# Altium PCB KL25Z_CAN_Interface.PcbDoc
Units mil, origin at the board's own origin, x right, y up, seen from the top; angles counter-clockwise.
Board outline 3185 x 2170 mil, 2 copper layers (Top Layer, Bottom Layer); 71 components, 52 nets, 234 pads, 28 vias.
Unrouted connection lines stored in the file: 2.
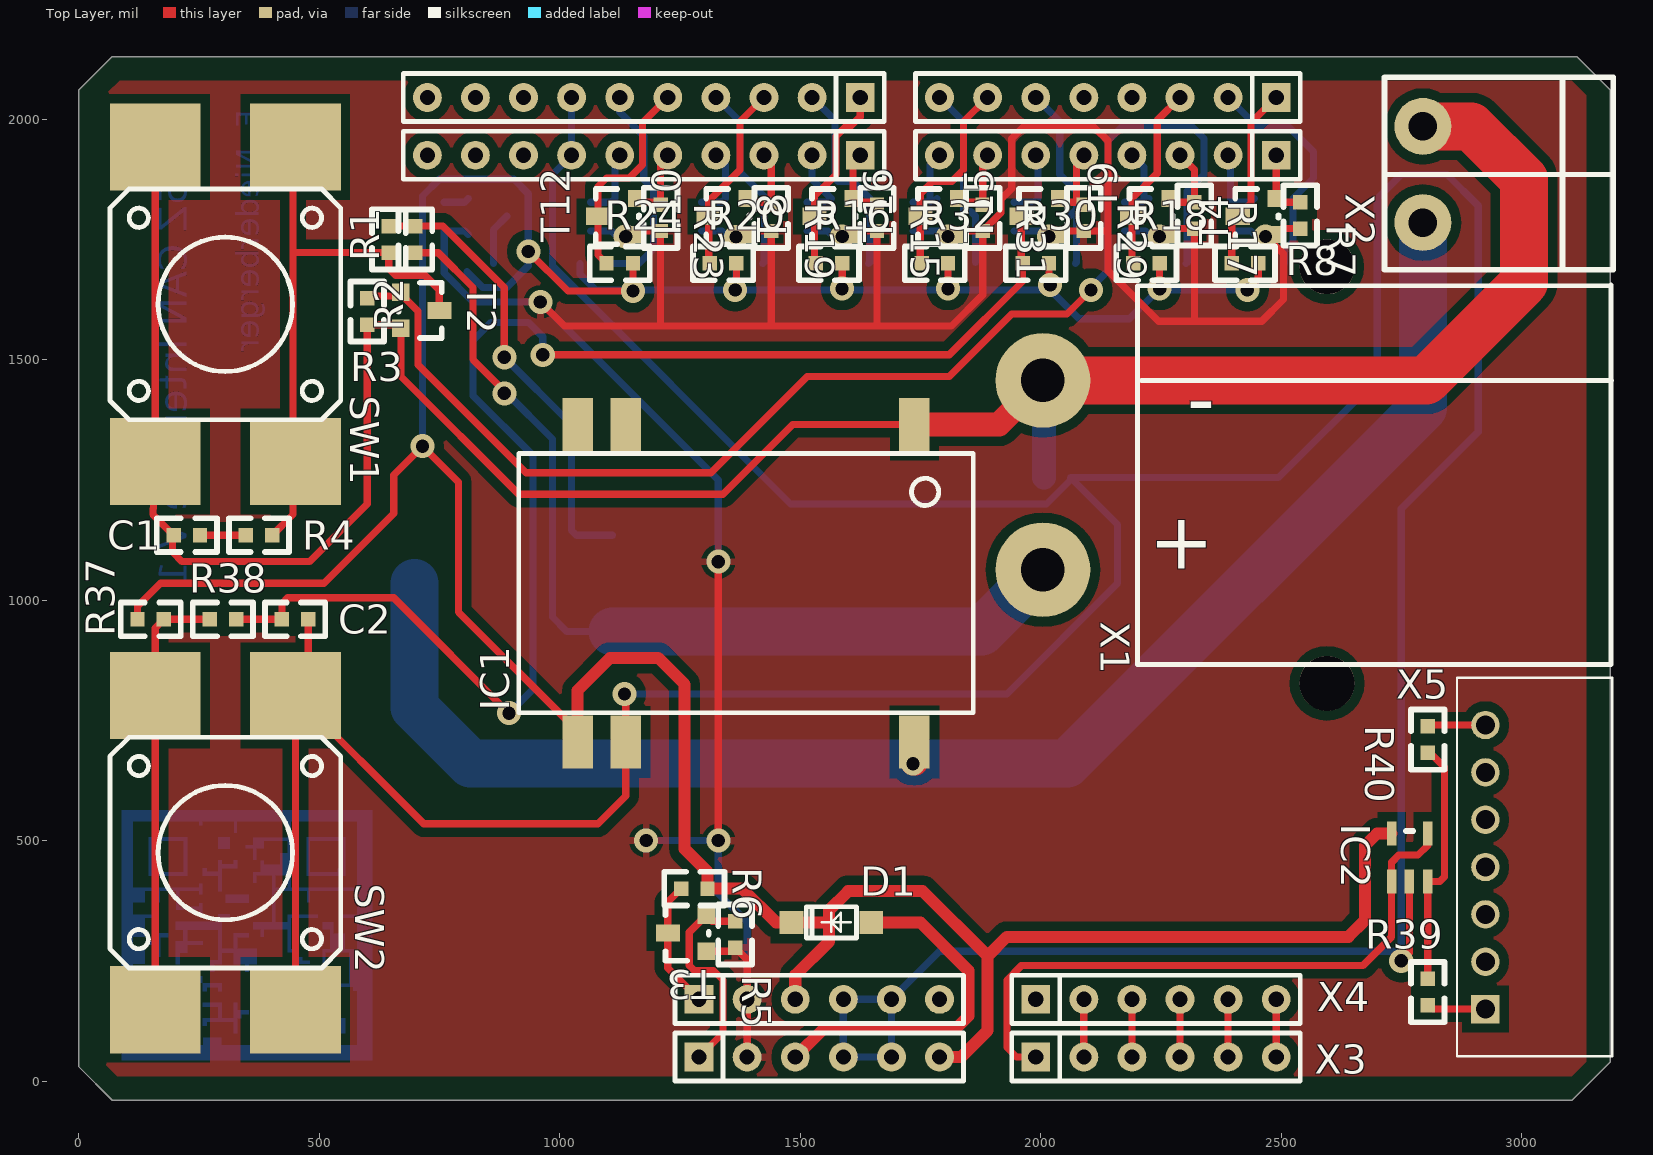
[diagram p0: Top Layer view]
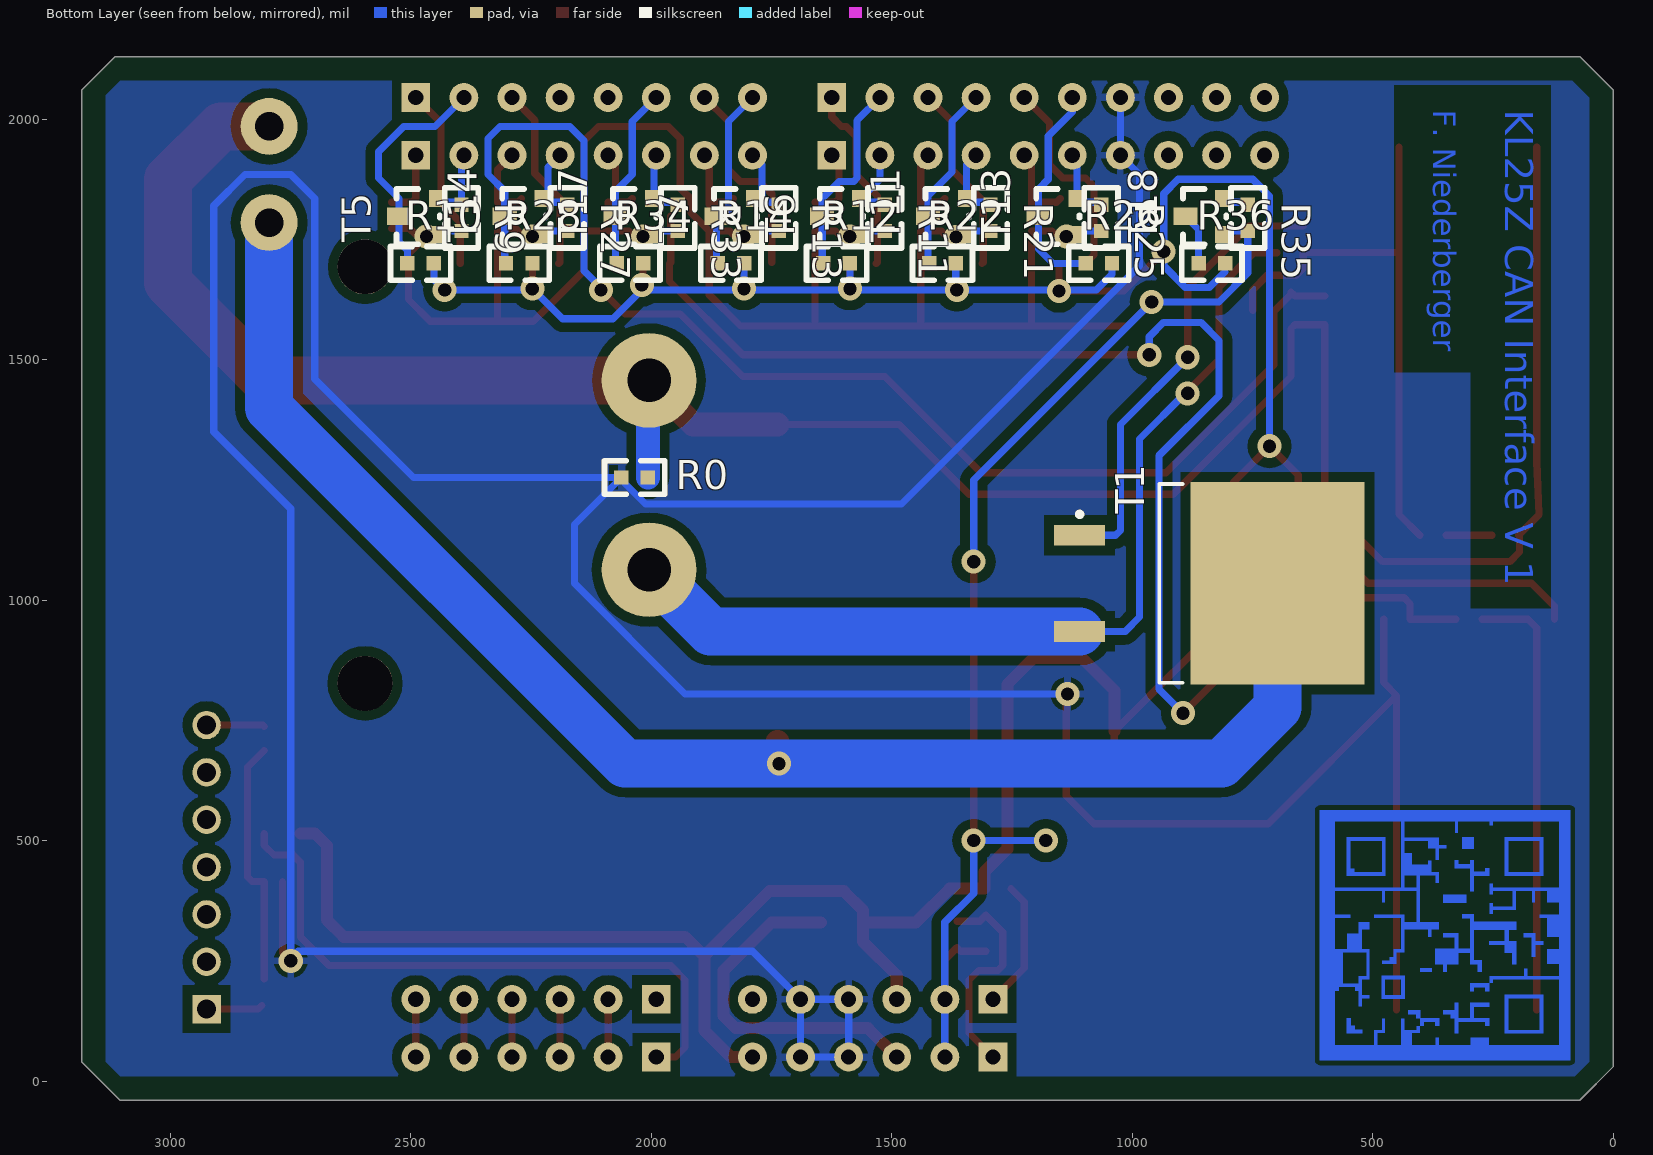
[diagram p1: Bottom Layer view, seen from below]

## Layer stack, top to bottom
Top Solder: solder mask 0.4, Solder Resist, Dk 3.5
Top Layer: signal copper 1.4
Dielectric 1: dielectric 12.6, FR-4, Dk 4.8
Bottom Layer: signal copper 1.4
Bottom Solder: solder mask 0.4, Solder Resist, Dk 3.5

## Board outline
0,30 0,2060 70,2130 3115,2130 3185,2060 3185,40 3105,-40 70,-40

## Design rules (kind name [scope] priority, off if disabled: settings)
Clearance [All] p1: gap=20 except(0: Poly-Text Region-Text; 10: Arc-Arc Arc-Track Arc-Region Poly-Region THPad-Region Track-Track Region-Region Arc-THPad SMDPad-SMDPad SMDPad-THPad Arc-SMDPad Fill-Region SMDPad-Region Track-SMDPad Track-THPad Via-Region THPad-THPad Track-Region; 15: Arc-Via SMDPad-Via Track-Via THPad-Via Via-Via)
HoleSize [All] p1: absolutevalues=TRUE maxlimit=150 minlimit=1 maxpercent=80.000 minpercent=20.000
PlaneClearance [All] p1: clearance=25
PlaneConnect [All] p1: planeconnectstyle=Relief reliefexpansion=20 reliefentries=4 reliefconductorwidth=15 reliefairgap=10
PolygonConnect [All] p1: connectstyle=Relief reliefconductorwidth=15 reliefentries=4 polygonreliefangle="90 Angle" airgapwidth=10
RoutingVias [All] p1: holewidth=27.56 width=50 viastyle="Through Hole" minholewidth=27.56 minwidth=50 maxholewidth=27.56 maxwidth=50
SolderMaskExpansion [All] p1: expansion=4
UnpouredPolygon [All] p1: allowunpoured=FALSE
Width [All] p1: maxlimit=100 minlimit=15 preferedwidth=15
26 further rules are at their usual default settings.

## Classes and differential pairs
component class KL25Z_CAN_Interface: C1 C2 D1 IC1 IC2 R0 R3 R5 R6 R37 R38 R39 R40 SW1 SW2 T1 T2 T3 X1 X2 X3 X4

## Components (designator, comment, footprint, x,y, rotation, side; value= is the part's Value field where it differs from the comment)
C1 "10n" 0603 225,1135 r180 top
C2 "10n" 0603 450,960 r0 top
D1 "MBR140" SOD-123FL 1565,330 r0 top
IC1 "DC/DC_converter" DC/DC_Conv 1860,1305 r180 top
IC2 "MCP6001" SOT-23-5 2765,475 r90 top
R0 "0" 0603 2035,1255 r180 bottom
R1 "10k" 0603 700,1750 r270 top
R2 "15k" 0603 645,1750 r90 top
R3 "10k" 0603 600,1600 r90 top
R4 "10k" 0603 375,1135 r0 top
R5 "10k" 0603 1365,305 r270 top
R6 "10k" 0603 1280,400 r0 top
R7 "10k" 0603 2540,1800 r270 top
R8 "10k" 0603 2425,1700 r0 top
R9 "10k" 0603 2395,1795 r270 bottom
R10 "10k" 0603 2480,1700 r180 bottom
R11 "10k" 0603 1515,1795 r270 bottom
R12 "10k" 0603 1615,1700 r180 bottom
R13 "10k" 0603 1735,1795 r270 bottom
R14 "10k" 0603 1835,1700 r180 bottom
R15 "10k" 0603 1660,1795 r270 top
R16 "10k" 0603 1560,1700 r0 top
R17 "10k" 0603 2320,1800 r270 top
R18 "10k" 0603 2220,1700 r0 top
R19 "10k" 0603 1440,1795 r270 top
R20 "10k" 0603 1340,1700 r0 top
R21 "10k" 0603 1295,1795 r270 bottom
R22 "10k" 0603 1395,1700 r180 bottom
R23 "10k" 0603 1210,1795 r270 top
R24 "10k" 0603 1125,1700 r0 top
R25 "10k" 0603 1065,1795 r270 bottom
R26 "10k" 0603 1070,1700 r180 bottom
R27 "10k" 0603 2175,1795 r270 bottom
R28 "10k" 0603 2275,1700 r180 bottom
R29 "10k" 0603 2090,1795 r270 top
R30 "10k" 0603 1990,1700 r0 top
R31 "10k" 0603 1880,1795 r270 top
R32 "10k" 0603 1780,1700 r0 top
R33 "10k" 0603 1945,1795 r270 bottom
R34 "10k" 0603 2045,1700 r180 bottom
R35 "10k" 0603 760,1795 r270 bottom
R36 "10k" 0603 835,1700 r180 bottom
R37 "10k" 0603 150,960 r180 top
R38 "10k" 0603 300,960 r180 top
R39 "220k" 0603 2805,185 r270 top
R40 "22k" 0603 2805,710 r270 top
SW1 "ON" TASTER_B3FS 305,1615 r90 top
SW2 "OFF" TASTER_B3FS 305,475 r270 top
T1 "IRF5305" D2PAK_M 840,1035 r180 bottom
T2 "BSS138" SOT-23 670,1640 r270 top
T3 "BSS138" SOT-23 1305,270 r90 top
T4 "BSS138" SOT-23 2490,1760 r90 top
T5 "BSS138" SOT-23 2445,1760 r90 bottom
T6 "BSS138" SOT-23 1565,1760 r90 bottom
T7 "BSS138" SOT-23 1785,1760 r90 bottom
T8 "BSS138" SOT-23 1610,1760 r90 top
T9 "BSS138" SOT-23 2270,1760 r90 top
T10 "BSS138" SOT-23 1390,1760 r90 top
T11 "BSS138" SOT-23 1345,1760 r90 bottom
T12 "BSS138" SOT-23 1160,1760 r90 top
T13 "BSS138" SOT-23 1115,1760 r90 bottom
T14 "BSS138" SOT-23 2225,1760 r90 bottom
T15 "BSS138" SOT-23 2040,1760 r90 top
T16 "BSS138" SOT-23 1830,1760 r90 top
T17 "BSS138" SOT-23 1995,1760 r90 bottom
T18 "BSS138" SOT-23 810,1760 r90 bottom
X1 "BAT" BAT_EC5/XT90_90 2005,1260 r180 top
X2 "Motor" POWER_WAGO_2 2795,1885 r180 top
X3 "Arduino" Arduino_Header 2540,975 r270 top
X4 "Arduino" Arduino_Header 2540,1095 r270 top
X5 "BAT_BAL" 68800711722 2925,445 r90 top

## Footprints (in the part's own frame and the unit in brackets; to place one, negate y for a bottom-side part, rotate by r counter-clockwise, add the part's x,y. Pads: shape width x height; smd on the part's side, far side on the other; paste and mask are expansions set on the pad)
0603 [mil]
  rect 30x30 smd: 1(-27.4,0) 2(27.6,0)
  silkscreen extent -62,-35 63,35, body extent -32,-16 32,16, height 26
68800711722 [mm] "7 pins, right angle"
  rect 1.5x1.5 hole 1: 1(-7.5,0)
  round 1.5 hole 1: 2(-5,0) 3(-2.5,0) 4(0,0) 5(2.5,0) 6(5,0) 7(7.5,0)
  silkscreen extent -10,-6.7 10,1.5, body extent -10,-6.7 10,1.5, height 4.21
Arduino_Header [mil]
  rect 60x60 hole 31.5: 1.1(925,-1250) 2.1(925,-550) 3.1(-950,-50) 4.1(-950,-915)
  round 60 hole 31.5: 1.2(925,-1150) 1.3(925,-1050) 1.4(925,-950) 1.5(925,-850) 1.6(925,-750) 2.2(925,-450) 2.3(925,-350) 2.4(925,-250) 2.5(925,-150) 2.6(925,-50) 3.2(-950,-150) 3.3(-950,-250) 3.4(-950,-350) 3.5(-950,-450) 3.6(-950,-550) 3.7(-950,-650) 3.8(-950,-750) 4.2(-950,-1015) 4.3(-950,-1115) 4.4(-950,-1215) 4.5(-950,-1315) 4.6(-950,-1415) 4.7(-950,-1515) 4.8(-950,-1615) 4.9(-950,-1715) 4.10(-950,-1815)
  silkscreen extent -1000,-1865 975,0, body extent -1000,-1865 975,0, height 335
BAT_EC5/XT90_90 [mm]
  round 5 hole 2.3: 1(0,5) 2(0,-5)
  round 2.9 hole 2.9: ""(-15,-11) ""(-15,11)
  silkscreen extent -30.02,-10.04 -5,10, body extent -29.97,-10.01 -5.03,10.01, height 10
D2PAK_M [mm] "D2-PAK, 4-Leads, Body 8.8x10.4mm, Pitch 2.54mm, Lead Span 15.1mm, IPC Low Density"
  rect 2.7x1.1 smd: 1(-6.85,2.54) 3(-6.85,-2.54)
  rect 9.2x10.7 smd: 2(3.6,0)
  silkscreen extent -6.98,-5.25 -1.4,5.25, body extent -2.65,-5.28 6.35,5.28, height 4.69
DC/DC_Conv [mm] "Delta Electronics DC/DC converter SD02S-Series"
  rect 1.6x2.8 smd: 1(3.11,-1.524) 7(18.35,-1.524) 8(20.89,-1.524) 9(20.89,15.24) 10(18.35,15.24) 16(3.11,15.24)
  silkscreen extent 0,0 24,13.7, body extent 0,0 23.88,13.72, height 8.25
POWER_WAGO_2 [mm] "Green WAGO Power Connector 2 Pin"
  round 3 hole 1.5: 1(0,2.54) 2(0,-2.54)
  silkscreen extent -10.06,-5.13 2.03,5.03, body extent -10.06,-5.13 1.98,5.03, height 8.5
SOD-123FL [mm]
  rect 1.25x1.22 smd: A(2.1,0) K(-2.1,0)
  silkscreen extent -1.33,-0.82 1.33,0.82, body extent -1.52,-1.02 1.52,1.02, height 1
SOT-23 [mil]
  rect 36x36 smd: 1(0,0) 2(75,0)
  rect 36x50 smd: 3(38,80)
  silkscreen extent -20,-5 95,85
SOT-23-5 [mil]
  rect 50x20 smd: 1(-60,35) 2(-60,-2) 3(-60,-40) 4(40,-40) 5(40,35)
  silkscreen extent 45,-10 45,5, body extent -40,-60 20,60, height 47
TASTER_B3FS [mm] "SMD Taster B3FS"
  rect 4.6x4.8 smd: 1(-8.3,-3.7) 1(8.3,-3.7) 2(-8.3,3.7) 2(8.3,3.7)
  silkscreen extent -6.1,-6.1 6.1,6.1, body extent -6.1,-6.1 6.1,6.1, height 4.3

## Part data
C1 C2: library part C?, "Normaler Kondensator"
D1: library part "D? ZENER", "Shottky-Diode"
IC1: "DC/DC Converter"
R0 R1 R2 R3 R4 R5 R6 R7 R8 R9 R10 R11 R12 R13 R14 R15 R16 R17 R18 R19 R20 R21 R22 R23 R24 R25 R26 R27 R28 R29 R30 R31 R32 R33 R34 R35 R36 R37 R38 R39 R40: library part R?, "Normaler Widerstand"
SW1 SW2: library part SW-PB
T1: library part "M? MOSFET-P", "P-channel mosfet"
T2 T3 T4 T5 T6 T7 T8 T9 T10 T11 T12 T13 T14 T15 T16 T17 T18: library part "M? MOSFET-N", "N-channel mosfet"
X1 X2: library part CON2
X3 X4: library part Arduino_Header
X5: library part "WE-2.50 mm Pitch J Serie 68800711722", "WR-WTB 2.50mm Male Shrouded Header J type"

## Via types
v1: diameter 50, hole 27.56, Top Layer to Bottom Layer, 28 vias

## Nets (pads, with @x,y where several pads share a name; then routed paths per layer and width w, separated by ;. In a path a pad name is that pad's centre, name@x,y a point inside that pad or via, vN(x,y) a via of type N, cw(c..) or ccw(c..) an arc to the next point about the centre after c; other vN are vias at no path point)
0V_PWR: C1.2 IC1.1 R0.2 R3.1 SW1.2 T2.2 X1.2 X2.2 | length 5161.6
  Top Layer w15: SW1.2@159.33,1941.77 159.33,1288.23 154.33,1178.07 C1.2 195,1132.6 195,1100 215,1080 480,1080 600,1200 R3.1 662.4,1572.6 T2.2 670,1465 915,1220 1340,1220 1485,1365 IC1.1
  Top Layer w50: IC1.1 1913.15,1365 X1.2
  Top Layer w100: X1.2 2801.85,1456.85 3005,1660 3005,1875 2895,1985 X2.2
  Bottom Layer w15: X1.2 X1.2@2007.4,1454.45
  Bottom Layer w50: R0.2 X1.2@2007.4,1454.45
0V_SIG: C2.2 IC1.10 IC2.2 R0.1 SW2.2 X3.1.4 X3.1.5 X3.4.7 X4.1.4 X4.1.5 X4.4.7 | length 9597.9
  Top Layer w15: SW2.2@450.67,148.23 SW2.2@450.67,801.77 ; C2.2 477.6,828.7 SW2.2@450.67,801.77 ; v1(1135,805) 1137.56,802.44 IC1.10 1137.56,592.56 1080,535 717.44,535 SW2.2@450.67,801.77 ; v1(2750,250) 2767,267 IC2.2
  Bottom Layer w15: X4.4.7 X3.4.7 985,1885 985,1695 1480,1200 2012.51,1200 R0.1@2062.4,1249.9 ; v1(1135,805) 1930,805 2160,1035 2160,1157.4 R0.1 2495,1255 2700,1460 2700,1835 2750,1885 2845,1885 2910,1820 2910,1350 2750,1190 v1(2750,250) ; 2735,270 1790,270 X4.1.5 ; X4.1.5 X4.1.4 X3.1.4 X3.1.5 X4.1.5
3V3: R5.2 R7.2 R9.2 R11.2 R13.2 R15.2 R17.2 R19.2 R21.2 R23.2 R25.2 R27.2 R29.2 R31.2 R33.2 R35.2 T3.1 T4.1 T5.1 T6.1 T7.1 T8.1 T9.1 T10.1 T11.1 T12.1 T13.1 T14.1 T15.1 T16.1 T17.1 T18.1 X3.1.2 X4.1.2 | length 6734.2
  Top Layer w15: v1(960,1620) 1010,1570 1440,1570 ; T12.1 1167.4,1767.4 R23.2 1210,1575 ; T3.1 1357.6,270 R5.2 1390,252.4 X4.1.2 X3.1.2 ; v1(1330,500) v1(1330,1080) ; v1(1366.57,1755) 1364.5,1757.07 1364.5,1760 T10.1 1397.4,1767.4 R19.2 1440,1570 ; v1(1587.5,1755.93) 1587.5,1757.5 1590,1760 T8.1 1617.4,1767.4 R15.2 1660,1570 ; T16.1 1837.4,1767.4 R31.2 ; T15.1 2047.4,1767.4 R29.2 2137.4,1767.4 ; v1(2247.5,1755.93) 2247.5,1757.5 2245,1760 T9.1 2282.4,1772.4 R17.2 2320,1580 ; v1@2465,1760 2505,1720 2505,1625 2460,1580 2320,1580 ; T4.1 2502.4,1772.4 R7.2 ; 1440,1570 1660,1570 ; 1660,1570 1815,1570 1880,1635 R31.2 ; R31.2 1917.5,1804.9 1917.5,1833.5 1940,1856 1940,1960 1965,1985 2110,1985 2140,1955 2140,1685 2245,1580 2320,1580
  Bottom Layer w15: T18.1 802.6,1767.4 R35.2 760,1680 820,1620 v1(960,1620) 1330,1250 v1(1330,1080) ; R25.2 1107.6,1767.4 T13.1 ; v1(1180,500) v1(1330,500) 1330,390 1390,330 X4.1.2 X3.1.2 ; R21.2 1337.6,1767.4 T11.1 1361.57,1760 v1(1366.57,1755) ; R11.2 1557.6,1767.4 T6.1 1583.43,1760 v1(1587.5,1755.93) ; R13.2 1796.03,1767.4 v1(1807.5,1755.93) ; R33.2 2006.03,1767.4 v1(2017.5,1755.93) ; R27.2 2217.6,1767.4 T14.1 2243.43,1760 v1(2247.5,1755.93) ; R9.2 2437.6,1767.4 T5.1
  other v1: 1137.5,1755.93 2467.5,1755.93
5V: D1.K IC1.9 IC2.5 R6.2 R8.2 R10.2 R12.2 R14.2 R16.2 R18.2 R20.2 R22.2 R24.2 R26.2 R28.2 R30.2 R32.2 R34.2 R36.2 R37.2 X3.1.6 X4.1.3 | length 7966.8
  Top Layer w15: R37.2 122.4,987.4 170,1035 510,1035 655,1180 655,1260 v1(715,1320) 790,1245 790,975 1037.56,727.44 IC1.9 ; v1(935,1725) 1017.4,1642.6 v1(1152.6,1642.6) R24.2 ; v1(1365,1645) 1367.6,1647.6 R20.2 ; v1(1587.4,1647.6) 1587.6,1647.4 R16.2 ; v1(1807.4,1647.6) 1807.6,1647.6 R32.2 ; v1@2017.6,1657.4 R30.2 ; v1(2247.6,1647.6) R18.2 ; v1(2430,1645) 2452.6,1667.6 R8.2
  Top Layer w25: IC1.9@1037.56,727.44 1037.56,812.56 1105,880 1205,880 1260,825 1260,482.56 1307.6,434.96 R6.2 1380,400 1450,330 D1.K 1560,330 ; X4.1.3 1490,220 1560,290 1560,330 ; X3.1.6 1835,50 1890,105 1890,260 ; IC2.5 2700,515 2675,490 2675,335 2640,300 1930,300 1890,260 ; 1560,330 1560,355 1600,395 1755,395 1890,260
  Bottom Layer w15: v1(715,1320) 715,1840 750,1875 905,1875 935,1845 v1(935,1725) 935,1695 890,1650 840,1650 807.4,1682.6 ; R26.2 1042.4,1677.6 1075,1645 v1(1365,1645) v1@2014.8,1645 ; v1@1367.4,1647.4 R22.2 ; v1(1587.4,1647.6) R12.2 ; v1(1807.4,1647.6) R14.2 ; v1@2017.4,1647.6 2080,1585 2185,1585 v1@2247.4,1647.4 ; v1@2250,1645 v1(2430,1645) 2452.4,1667.4 R10.2
  other v1: 2020,1655
24V: IC1.16 T1.2 X2.1 | length 3145.9
  Top Layer w50: v1(1735,660) 1740,660 1737.56,662.44 IC1.16
  Bottom Layer w100: T1.2 698.27,776.73 815,660 v1(1735,660) 2055,660 2795,1400 X2.1
BAT: R1.2 T1.3 X1.1 | length 1991.8
  Top Layer w15: R1.2 747.6,1722.4 820,1650 820,1500 885,1435 v1(885,1430)
  Bottom Layer w15: v1(885,1430) 890,1430 985,1335 985,965 1015,935 T1.3
  Bottom Layer w100: T1.3 1876.85,935 X1.1
NetC1_1: C1.1 R4.1 | length 95.2
  Top Layer w15: C1.1 R4.1
NetC2_1: C2.1 R30.1 R38.1 T15.3 | length 2960.2
  Top Layer w15: R38.1 C2.1 422.6,992.6 435,1005 655,1005 v1(895,765) ; v1(965,1510) 1810,1510 1962.6,1662.6 R30.1 1960,1702.6 T15.3
  Bottom Layer w15: v1(895,765) 945,815 945,1300 820,1425 820,1540 857.5,1577.5 935.32,1577.5 965,1547.82 v1(965,1510)
NetD1_A: D1.A X3.1.3 | length 734
  Top Layer w25: X3.1.3 1550,110 1825,110 1850,135 1850,230 1750,330 D1.A
NetIC2_1: IC2.1 IC2.4 X3.2.1 | length 1340.1
  Top Layer w10: X3.2.1 X3.2.1@2015,50
  Top Layer w15: X3.2.1 1950,50 1930,70 1930,210 1960,240 2670,240 2730,300 IC2.1 2730,455 2745,470 2785,470 2805,490 IC2.4
NetIC2_3: IC2.3 R39.1 R40.2 | length 518.6
  Top Layer w15: R39.1 IC2.3 2830,415 2840,425 2840,652.4 R40.2@2805,687.4
NetR1_1: R1.1 R2.2 T1.1 | length 944.7
  Top Layer w15: R2.2 757.4,1777.6 885,1650 v1(885,1505)
  Bottom Layer w15: v1(885,1505) 1025,1365 1025,1145 1035,1135 T1.1
NetR2_1: R2.1 R4.2 SW1.1 T2.3 | length 1224.3
  Top Layer w15: R4.2 445.67,1178.07 445.67,1288.23 445.67,1720 ; SW1.1@445.67,1941.77 445.67,1720 ; T2.3 750,1645 719.5,1675.5 659.5,1675.5 645,1690 R2.1 448.27,1722.6 445.67,1720
NetR3_2: R3.2 R28.1 T2.1 T14.3 | length 2733.9
  Top Layer w15: R3.2@600,1632.6 662.6,1632.6 T2.1 ; T2.1@670,1636 705.5,1600.5 705.5,1489.5 930,1265 1315,1265 1515,1465 1810,1465 1940,1595 2055,1595 v1(2105,1645)
  Bottom Layer w15: v1(2105,1645) v1@2100,1645 ; R28.1 2305,1702.6 T14.3 2305,1850 2340,1885 2340,1960 2315,1985 2170,1985 2140,1955 2140,1685 v1@2100,1645 ; v1@2100,1645 2097.18,1645 2092.18,1640 2095,1640 v1@2100,1645
NetR5_1: R5.1 T3.2 X3.1.1 | length 448.3
  Top Layer w15: X3.1.1 1340,100 1340,210 1320,230 1280,230 1269.5,240.5 1269.5,309.5 T3.2 1317.6,332.4 R5.1
NetR6_1: R6.1 T3.3 X4.1.1 | length 268.4
  Top Layer w15: R6.1 1225,372.4 T3.3 1225,235 X4.1.1
NetR7_1: R7.1 T4.2 X3.3.1 | length 143.1
  Top Layer w15: X3.3.1 T4.2 2497.6,1827.4 R7.1
NetR8_1: R8.1 T4.3 X4.3.1 | length 383.3
  Top Layer w15: R8.1 2397.6,1785.6 T4.3 2437.5,1825.5 2437.5,1992.5 X4.3.1
NetR9_1: R9.1 T5.2 X3.3.2 | length 157.8
  Bottom Layer w15: X3.3.2 2395,1920 R9.1@2395,1827.4 ; R9.1 R9.1@2395,1827.4 ; T5.2 2437.4,1827.4 R9.1@2395,1827.4
NetR10_1: R10.1 T5.3 X4.3.2 | length 481.6
  Bottom Layer w15: X4.3.2 2450,1985 2515,1985 2567.6,1932.4 2567.6,1877.6 2525,1835 T5.3 2525,1745 2507.4,1727.4 R10.1
NetR11_1: R11.1 T6.2 X3.4.2 | length 159.7
  Bottom Layer w15: R11.1@1515,1827.4 1557.4,1827.4 T6.2 1525,1875 X3.4.2
NetR12_1: R12.1 T6.3 X4.4.2 | length 413.4
  Bottom Layer w15: X4.4.2 1572.5,1997.5 1572.5,1877.5 1579.5,1870.5 1609.5,1870.5 1645,1835 T6.3 1645,1702.6 R12.1
NetR13_1: R13.1 T7.2 X3.3.8 | length 151.4
  Bottom Layer w15: R13.1@1735,1827.4 1777.4,1827.4 T7.2 ; T7.2@1770,1835 1770,1905 X3.3.8
NetR14_1: R14.1 T7.3 X4.3.8 | length 367.3
  Bottom Layer w15: X4.3.8 1840,1995 T7.3@1840,1808 ; T7.3@1855,1808 T7.3 R14.1@1865,1702.6
NetR15_1: R15.1 T8.2 X3.4.1 | length 149.4
  Top Layer w15: X3.4.1 1610,1910 T8.2 1617.6,1827.4 R15.1@1660,1827.4
NetR16_1: R16.1 T8.3 X4.4.1 | length 391.3
  Top Layer w15: R16.1 1530,1702.6 T8.3 1530,1840 1575,1885 1575,1965 1595,1985 1605,1985 1625,2005 X4.4.1
NetR17_1: R17.1 T9.2 X3.3.3 | length 163.2
  Top Layer w15: T9.2 2277.6,1827.4 R17.1 2320,1895 X3.3.3
NetR18_1: R18.1 T9.3 X4.3.3 | length 387.5
  Top Layer w15: R18.1 2190,1702.6 T9.3 2190,1835 2242.5,1887.5 2242.5,1997.5 X4.3.3
NetR19_1: R19.1 T10.2 X3.4.3 | length 162
  Top Layer w15: T10.2 1397.6,1827.4 R19.1@1440,1827.4 ; X3.4.3 1440,1910 R19.1@1440,1827.4 ; R19.1 R19.1@1440,1827.4
NetR20_1: R20.1 T10.3 X4.4.3 | length 393.7
  Top Layer w15: R20.1 1310,1702.6 T10.3 1310,1830 1375,1895 1375,1995 X4.4.3
NetR21_1: R21.1 T11.2 X3.4.4 | length 151.4
  Bottom Layer w15: R21.1@1295,1827.4 1337.4,1827.4 T11.2 1345,1905 X3.4.4
NetR22_1: R22.1 T11.3 X4.4.4 | length 387.5
  Bottom Layer w15: X4.4.4 1375,1995 1375,1890 1425,1840 T11.3 1425,1702.6 R22.1
NetR23_1: R23.1 T12.2 X3.4.5 | length 150.7
  Top Layer w15: T12.2@1150,1835 1157.6,1827.4 R23.1@1210,1827.4 ; R23.1 R23.1@1210,1827.4 ; X3.4.5@1210,1910 R23.1@1210,1827.4
NetR24_1: R24.1 T12.3 X4.4.5 | length 440
  Top Layer w15: R24.1 1080,1717.6 T12.3 1080,1860 1097.5,1877.5 1144.68,1877.5 1172.5,1905.32 1172.5,1992.5 X4.4.5
NetR25_1: R25.1 T13.2 X3.4.6 | length 133.1
  Bottom Layer w15: R25.1@1065,1827.4 1107.4,1827.4 T13.2 X3.4.6@1115,1915
NetR26_1: R26.1 T13.3 X4.4.6 | length 454
  Bottom Layer w15: R26.1 1165,1700 1195,1730 T13.3 1195,1855 1175,1875 1175,1965 1125,2015 X4.4.6
NetR27_1: R27.1 T14.2 X3.3.4 | length 153.5
  Bottom Layer w15: R27.1@2175,1827.4 2217.4,1827.4 T14.2 ; X3.3.4 2215,1900 T14.2@2215,1835
NetR29_1: R29.1 T15.2 X3.3.5 | length 162
  Top Layer w15: T15.2 2047.6,1827.4 2090,1827.4 R29.1 ; R29.1@2075,1827.4 2075,1910 X3.3.5
NetR31_1: R31.1 T16.2 X3.3.7 | length 159.9
  Top Layer w15: T16.2 1837.6,1827.4 R31.1@1880,1827.4 ; R31.1 R31.1@1880,1827.4 ; X3.3.7 1880,1915 R31.1@1880,1827.4
NetR32_1: R32.1 T16.3 X4.3.7 | length 423.8
  Top Layer w15: R32.1@1750,1702.6 T16.3 1750,1845 1775.5,1870.5 1815.5,1870.5 1840,1895 1840,1995 X4.3.7
NetR33_1: R33.1 T17.2 X3.3.6 | length 159.4
  Bottom Layer w15: R33.1@1945,1827.4 1987.4,1827.4 T17.2 1995,1920 X3.3.6 X3.3.6@1980,1915
NetR34_1: R34.1 T17.3 X4.3.6 | length 387.5
  Bottom Layer w15: X4.3.6 2040,1995 2040,1885 2075,1850 2075,1813 T17.3@2060,1798 ; R34.1 2075,1702.6 T17.3
NetR35_1: R35.1 T18.2 | length 53.1
  Bottom Layer w15: R35.1@760,1827.4 802.4,1827.4 T18.2
NetR36_1: R36.1 T18.3 | length 109.4
  Bottom Layer w15: R36.1 862.4,1770.4 T18.3
NetR37_1: R37.1 R38.2 SW2.1 | length 914.3
  Top Layer w15: SW2.1@159.33,148.23 159.33,801.77 159.33,941.93 R37.1 R38.2
NetR39_2: R39.2 X5.1 | length 118.2
  Top Layer w15: R39.2@2810,157.4 2817.68,149.73 X5.1
NetR40_1: R40.1 X5.7 | length 121.2
  Top Layer w15: R40.1 2807.87,740.28 X5.7
NetX3_2.2: X3.2.2 X4.2.2 | length 120
  Top Layer w15: X3.2.2 X4.2.2
NetX3_2.3: X3.2.3 X4.2.3 | length 120
  Top Layer w15: X3.2.3 X4.2.3
NetX3_2.4: X3.2.4 X4.2.4 | length 120
  Top Layer w15: X3.2.4 X4.2.4
NetX3_2.5: X3.2.5 X4.2.5 | length 120
  Top Layer w15: X3.2.5 X4.2.5
NetX3_2.6: X3.2.6 X4.2.6 | length 120
  Top Layer w15: X3.2.6 X4.2.6
pads on no net: IC1.7 IC1.8 X1. X3.4.8 X3.4.9 X3.4.10 X4.1.6 X4.2.1 X4.3.4 X4.3.5 X4.4.8 X4.4.9 X4.4.10 X5.2 X5.3 X5.4 X5.5 X5.6

## Polygon pours and split planes (outlines as drawn)
0V_SIG on Bottom Layer "Bottom_Layer-GND" (solid, remove dead copper, pour order 2): 85,2080 3105,2080 3135,2050 3135,40 3105,10 80,10 50,40 50,2045
3V3 on Top Layer "Top_Layer_3V3" (solid, remove dead copper, pour order 4): 85,2080 3105,2080 3135,2050 3135,40 3105,10 80,10 50,40 50,2045

## Other copper
Bottom Layer:
  region: 314,507 314,483 290,483 290,507
  region: 162,291 162,307 186,307 186,299 170,299 170,259 162,259 162,283 146,283 146,291
  region: 402,131 402,147 426,147 426,139 410,139 410,131 402,131 402,115 394,115 394,123 370,123 370,115 362,115 362,131
  region: 354,387 354,371 306,371 306,387
  region: 266,443 266,435 290,435 290,459 298,459 298,451 322,451 322,459 330,459 330,443 298,443 298,395 290,395 290,427 258,427 258,443
  region: 298,163 298,131 322,131 322,163 330,163 330,147 354,147 354,139 338,139 338,131 330,131 330,99 322,99 322,123 266,123 266,115 258,115 258,131 290,131 290,155 258,155 258,163
  region: 482,219 482,171 434,171 434,219 hole: 442,211 442,179 450,179 458,179 466,179 474,179 474,211 466,211 458,211 450,211
  region: 290,331 290,347 314,347 314,339 298,339 298,275 322,275 322,307 354,307 354,299 330,299 330,275 370,275 370,243 354,243 354,227 346,227 346,243 322,243 322,267 298,267 298,243 282,243 282,227 274,227 274,251 290,251 290,315 226,315 226,291 258,291 258,283 226,283 226,267 210,267 210,243 202,243 202,291 218,291 218,315 202,315 202,331
  region: 554,507 554,427 474,427 474,507 hole: 482,499 482,435 490,435 498,435 506,435 514,435 522,435 530,435 538,435 538,443 546,443 546,499 538,499 530,499 522,499 514,499 506,499 498,499 490,499
  region: 226,179 226,99 146,99 146,179 hole: 154,171 154,107 162,107 170,107 178,107 186,107 194,107 202,107 210,107 218,107 218,171 210,171 202,171 194,171 186,171 178,171 170,171 162,171
  region: 226,507 226,427 146,427 146,507 hole: 154,499 154,435 162,435 170,435 178,435 186,435 194,435 202,435 210,435 218,435 218,499 210,499 202,499 194,499 186,499 178,499 170,499 162,499
  region: 5 vertices and 4 holes, not listed, extent 90,43 610,563
  region: 298,203 298,187 290,187 290,195 266,195 266,187 258,187 258,203
  region: 402,235 402,227 378,227 378,235
  region: 538,107 538,115 546,115 546,131 554,131 554,99 522,99 522,107
  text "KL25Z CAN Interface V 1" at 245,2020 h100 r90
  text "F. Niederberger" at 390,2020 h80 r90

## Silkscreen, mask and mechanical layers (free items; w line width, h text height)
Mechanical 1:
  the board outline again, w10

## Text inside footprints (layer, text, board x,y; h text height)
X1: Top Overlay "+" at 2361,1166 h118.11 r180; Top Overlay "-" at 2363,1450 h118.11 r180